# EAGLE board motherboard (EAGLE 9.6.2)
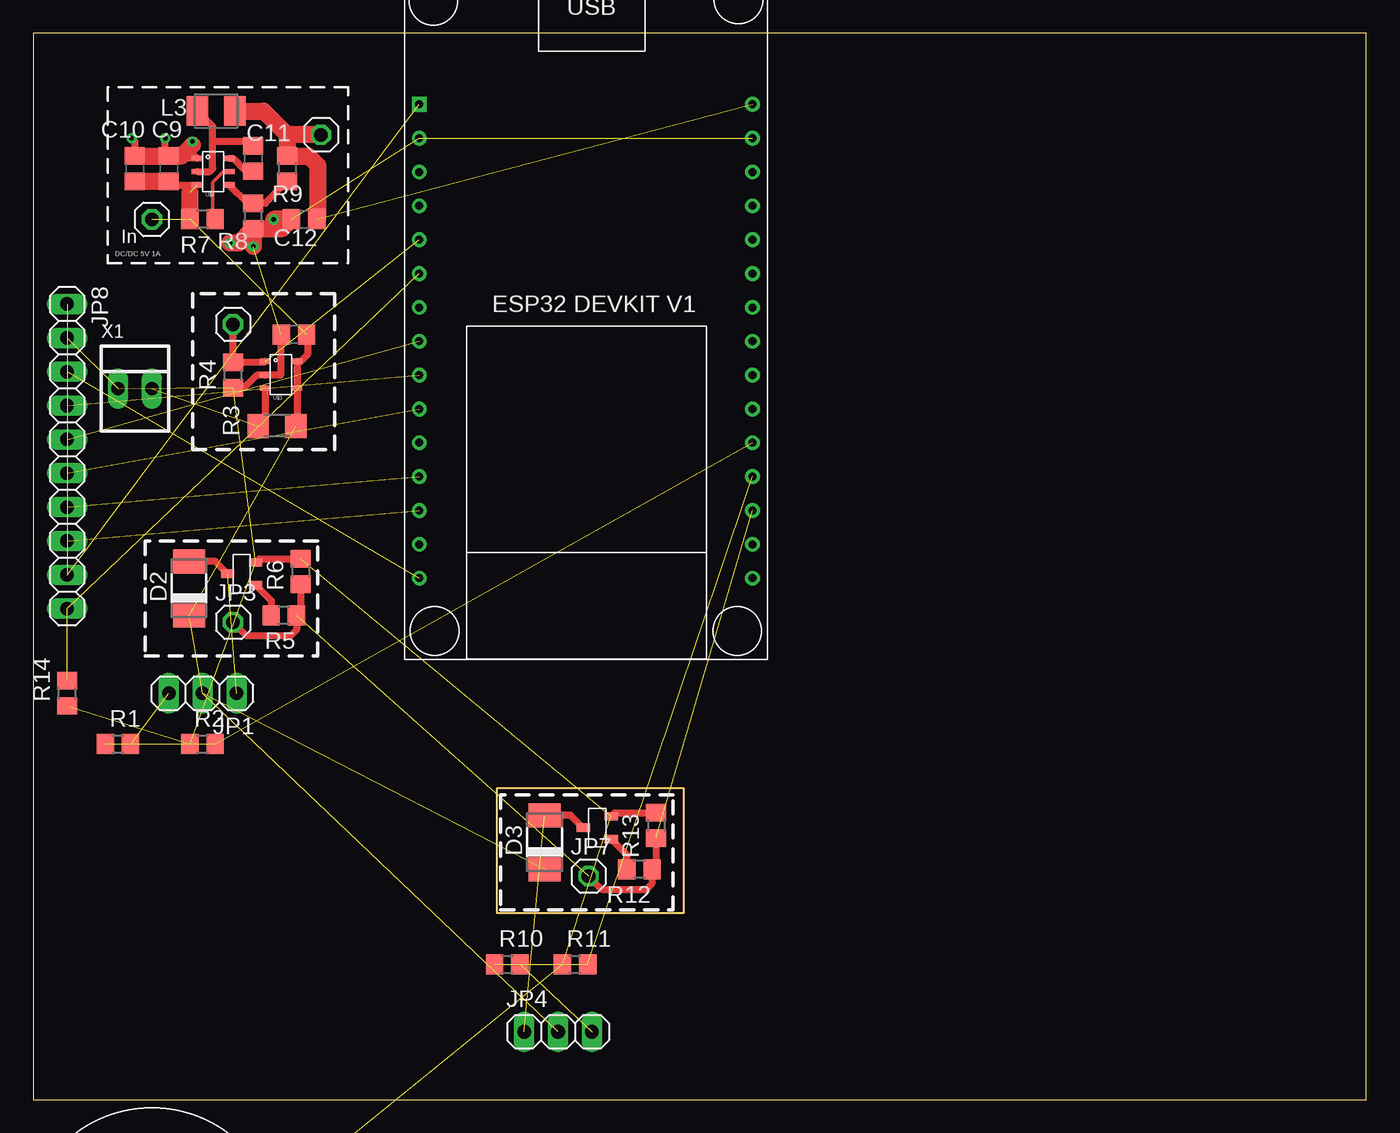
[diagram p0: board, top side]
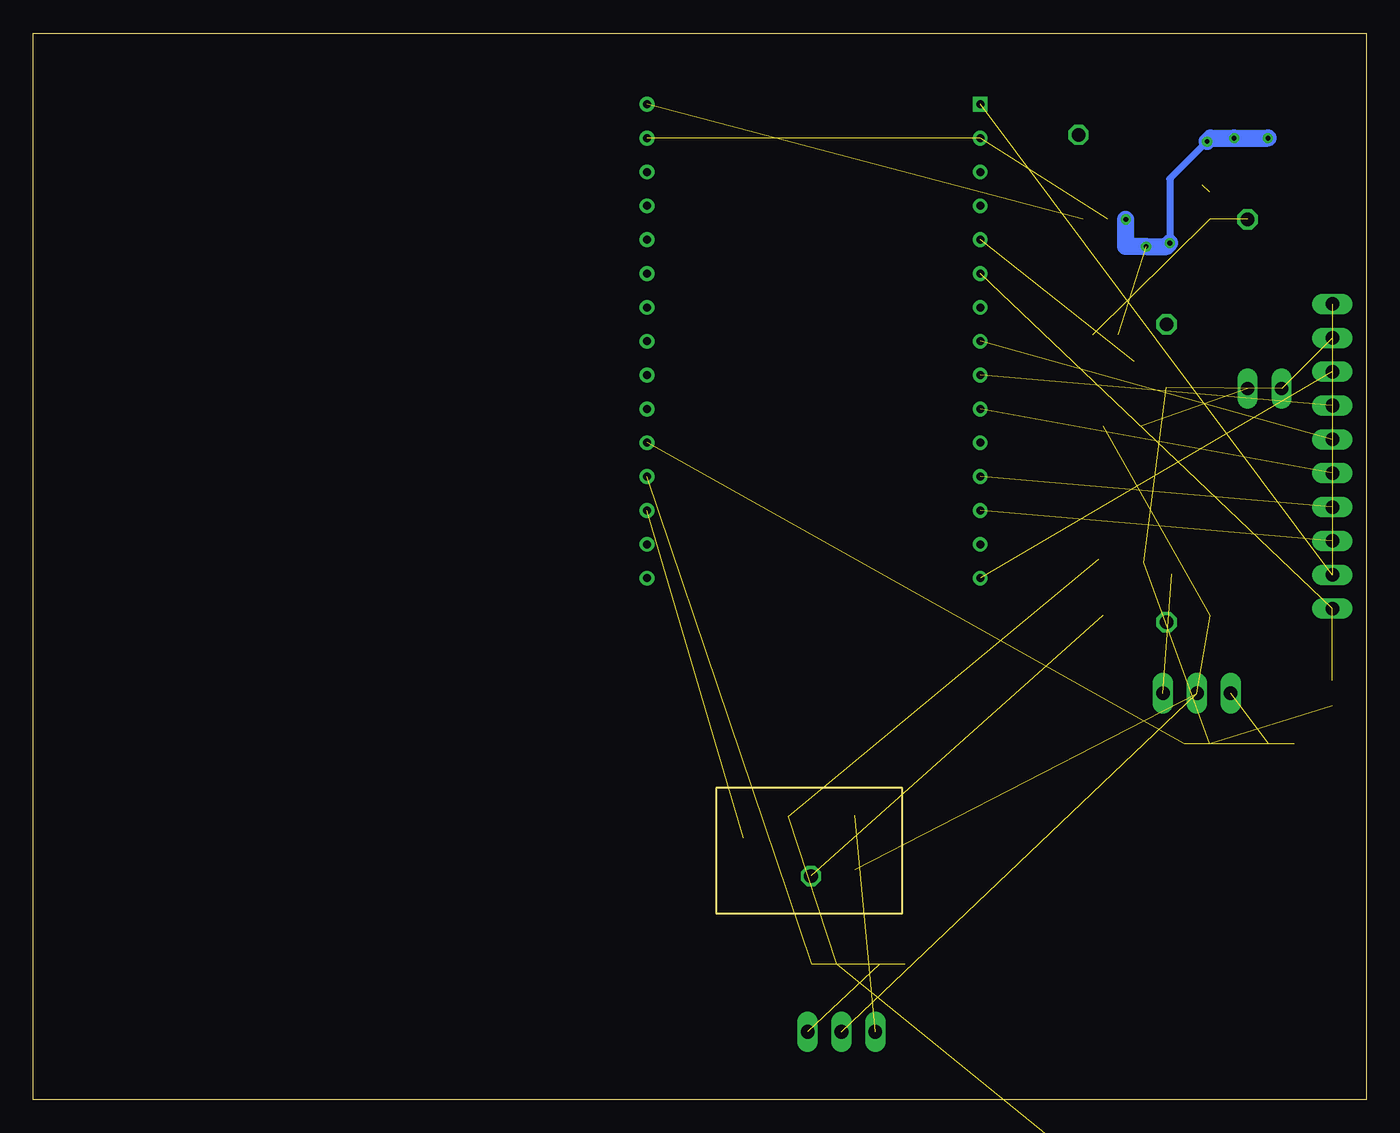
[diagram p1: board, bottom side, seen from below]

Size 100 x 80 mm. Coordinates in mm from the lower left corner, seen from the top.
Outline: 0,0 100,0 100,80 0,80 0,0
Outline: 34.8,13.97 34.8,23.37 48.77,23.37 48.77,13.97 34.8,13.97
Copper layers (1*16): Top 0.035mm / dielectric 1.5mm / Bottom 0.035mm
Design rules "default": minimum track width 6mil, minimum drill 0.35mm, track to track 6mil, track to pad 6mil, pad to pad 6mil, via to via 6mil, smd to smd 6mil, copper to edge 40mil, drill to drill 6mil, minimum pad ring 10mil, minimum via ring 8mil, stop-mask expansion 4mil, vias tented up to drill 0mil, thermal gap 10mil

## Footprints (pad centres in the part's own frame; a part is rotated, then mirrored left to right if it is on the bottom)
C0805 = smd 1.3 x 1.5: 1 -0.95,0; 2 0.95,0
DO-214AC = smd 1.8 x 2.4: A 2.025,0; C -2.025,0
1X03 = drill 1.016 long: 1 -2.54,0; 2 0,0; 3 2.54,0
1X01 = drill 1.016 octagon: 1 0,0
1X10 = drill 1.016 long: 1 -11.43,0; 2 -8.89,0; 3 -6.35,0; 4 -3.81,0; 5 -1.27,0; 6 1.27,0; 7 3.81,0; 8 6.35,0; 9 8.89,0; 10 11.43,0
L3225M = smd 1.6 x 2.2: 1 -1.4,0; 2 1.4,0
R0805 = smd 1.3 x 1.5: 1 -0.95,0; 2 0.95,0
R1206 = smd 1.6 x 1.803: 1 -1.422,0; 2 1.422,0
ESP32_DEVKIT_V1 = drill 0.6 square: PIN_0 -12.954,17.526 | drill 0.6: PIN_1 -12.954,14.986; PIN_2 -12.954,12.446; PIN_3 -12.954,9.906; PIN_4 -12.954,7.366; PIN_5 -12.954,4.826; PIN_6 -12.954,2.286; PIN_7 -12.954,-0.254; PIN_8 -12.954,-2.794; PIN_9 -12.954,-5.334; PIN_10 -12.954,-7.874; PIN_11 -12.954,-10.414; PIN_12 -12.954,-12.954; PIN_13 -12.954,-15.494; PIN_14 -12.954,-18.034; PIN_15 12.046,-18.034; PIN_16 12.046,-15.494; PIN_17 12.046,-12.954; PIN_18 12.046,-10.414; PIN_19 12.046,-7.874; PIN_20 12.046,-5.334; PIN_21 12.046,-2.794; PIN_22 12.046,-0.254; PIN_23 12.046,2.286; PIN_24 12.046,4.826; PIN_25 12.046,7.366; PIN_26 12.046,9.906; PIN_27 12.046,12.446; PIN_28 12.046,14.986; PIN_29 12.046,17.526
MQ_2 = drill 1.2 pad 1.93: A1 -3.4,3.4; A2 -3.4,-3.4; B1 3.3,3.4; B2 3.4,-3.4; H1 0,4.75; H2 0,-4.75
SOT23_5_PIN = smd 0.813 x 0.406: 1 -0.4,-0.5; 2 -0.4,-1.5; 3 -0.4,-2.5; 4 2,-2.5; 5 2,-0.5
SOT23_6_PIN = smd 0.813 x 0.406: 1 -0.4,-0.5; 2 -0.4,-1.5; 3 -0.4,-2.5; 4 2,-2.5; 5 2,-1.5; 6 2,-0.5
SOT23_3_PIN = smd 1 x 0.635: P$1 1.7,-2.3; P$2 1.7,-0.6; P$3 -0.4,-1.45
22-23-2021 = drill 1 long: 1 -1.27,0; 2 1.27,0

## Placement (x,y rotation side)
C1  100n  [C0805]  1.27,-29.21 0 top  (outside the outline)
C2  100n  [C0805]  19.56,57.4 180 top
C9  10u  [C0805]  10.16,69.85 90 top
C10  0.1u  [C0805]  7.62,69.85 90 top
C11  0.1u  [C0805]  16.51,70.61 270 top
C12  50u  [C0805]  20.32,66.04 180 top
D2  1N4148  [DO-214AC]  11.68,38.35 90 top
D3  1N4148  [DO-214AC]  38.35,19.3 90 top
JP1  FAN1  [1X03]  12.7,30.48 180 top
JP2  VSENSE  [1X01]  14.99,58.17 0 top
JP3  FAN1  [1X01]  14.99,35.81 0 top
JP4  FAN2  [1X03]  39.37,5.08 0 top
JP5  4.5V-17V  [1X01]  8.89,66.04 0 top
JP6  7V  [1X01]  21.59,72.39 0 top
JP7  FAN2  [1X01]  41.66,16.76 0 top
JP8  UI  [1X10]  2.54,48.26 270 top
L3  4.7u  [L3225M]  13.72,74.17 0 top
R1  100k  [R0805]  6.35,26.67 0 top
R2  10k  [R0805]  12.7,26.67 0 top
R3  0.1  [R1206]  18.29,50.55 0 top
R4  10k  [R0805]  14.99,54.36 90 top
R5  1k  [R0805]  18.8,36.32 180 top
R6  100k  [R0805]  20.07,39.62 270 top
R7  10k  [R0805]  12.7,66.04 180 top
R8  10k  [R0805]  16.51,66.29 90 top
R9  90k  [R0805]  19.05,69.85 270 top
R10  100k  [R0805]  35.56,10.16 0 top
R11  10k  [R0805]  40.64,10.16 0 top
R12  1k  [R0805]  45.47,17.27 180 top
R13  100k  [R0805]  46.74,20.57 270 top
R14  100k  [R0805]  2.54,30.48 90 top
R15  20k  [R0805]  1.27,-22.86 0 top  (outside the outline)
U$1  ESP32_DEVKIT_V1  [ESP32_DEVKIT_V1]  41.91,57.15 0 top
U$2  MQ_2  [MQ_2]  8.89,-10.16 0 top  (outside the outline)
U$3  INA169  [SOT23_5_PIN]  17.78,55.88 0 top
U$4  TPS561201  [SOT23_6_PIN]  12.7,71.12 0 top
U$5  MGSF1N03L  [SOT23_3_PIN]  14.99,40.89 0 top
U$6  MGSF1N03L  [SOT23_3_PIN]  41.66,21.84 0 top
X1  22-23-2021  [22-23-2021]  7.62,53.34 0 top

## Library data of the parts
C1 C2 C9-C12 = rcl; SPICEPREFIX: C
D2 D3 = diode
JP1-JP8 = pinhead
L3 = rcl; SPICEPREFIX: L
R1-R15 = rcl; SPICEPREFIX: R
U$1-U$6 = bzd
X1 = con-molex; MF: MOLEX; MPN: 22-23-2021; OC_FARNELL: 1462926; OC_NEWARK: 25C3832

## Nets
3.3V: JP8.1 JP8.9 U$1.PIN_0
7V: C12.1 JP6.1 L3.2 R9.1 U$1.PIN_29
12V: R3.1 U$3.3 X1.2
EINK_BUSY: JP8.8 U$1.PIN_12
EINK_DC: JP8.6 U$1.PIN_9
EINK_RST: JP8.7 U$1.PIN_11
FAN1_SENSE: R1.1 R2.2 U$1.PIN_19
FAN2_SENSE: R10.1 R11.2 U$1.PIN_18
FAN_SWITCH: JP3.1 JP7.1 R5.1 R6.2 R12.1 R13.2 U$1.PIN_17
GND: C1.2 C2.2 C9.2 C10.2 C12.2 JP8.2 R2.1 R4.1 R6.1 R8.1 R11.1 R13.1 R14.1 R15.1 U$1.PIN_1 U$1.PIN_28 U$2.H2 U$3.2 U$4.1 U$5.P$2 U$6.P$2 X1.1
GND_FAN1: D2.A JP1.1 U$5.P$3
GND_FAN2: D3.A JP4.1 U$6.P$3
I2C_SCL: U$1.PIN_13
I2C_SDA: U$1.PIN_10
N$1: JP1.3 R1.2
N$2: R5.2 U$5.P$1
N$3: JP4.3 R10.2
N$4: R12.2 U$6.P$1
N$5: U$2.A1 U$2.A2 U$2.H1
N$6: C1.1 R15.2 U$2.B1 U$2.B2
N$9: C11.2 U$4.6
N$10: R7.1 U$4.5
N$11: R8.2 R9.2 U$4.4
N$12: C11.1 L3.1 U$4.2
SPI_CLK: JP8.4 U$1.PIN_8
SPI_CS0: JP8.5 U$1.PIN_7
SPI_MOSI: JP8.3 U$1.PIN_14
SWITCH: JP8.10 R14.2 U$1.PIN_5
VIN_REG: C2.1 C9.1 C10.1 D2.C D3.C JP1.2 JP4.2 JP5.1 R3.2 R7.2 U$3.4 U$3.5 U$4.3
VOUT_CURRENT: JP2.1 R4.2 U$1.PIN_4 U$3.1

## Tracks (layer width: path | path; a pad name or v marks a point on that pad's centre or on a via)
3.3V  (2 unrouted)
7V  (1 unrouted)
  Top 0.508: 21.34,66.11 C12.1
  Top 1.27: L3.2 17.27,74.17 19.05,72.39 | JP6.1 19.05,72.39 | 19.05,72.39 R9.1 20.64,70.8 21.34,70.1 21.34,66.11
12V  (1 unrouted)
  Top 0.508: U$3.3 17.38,51.06 R3.1
EINK_BUSY  (1 unrouted)
EINK_DC  (1 unrouted)
EINK_RST  (1 unrouted)
FAN1_SENSE  (2 unrouted)
FAN2_SENSE  (2 unrouted)
FAN_SWITCH  (2 unrouted)
  Top 0.508: R6.2 20.07,36.64 R5.1 19.75,35.24 19.3,34.8 16,34.8 JP3.1 | R13.2 46.74,17.59 R12.1 46.42,16.19 45.97,15.75 42.67,15.75 JP7.1
GND  (via drill 0.35)  (13 unrouted)
  Top 0.508: v11.94,71.88 11.94,71.63 11.94,70.98 U$4.1 10.34,70.62 C9.2 9.91,71.05 v9.91,72.14 | v7.37,72.14 7.62,71.88 C10.2 | C2.2 18.54,57.34 18.54,54.36 17.4,54.36 U$3.2 17.36,54.36 16.76,54.36 15.81,53.41 R4.1 | U$5.P$2 16.97,40.57 R6.1 | U$6.P$2 43.64,21.52 R13.1
  Top 1.27: C10.2 C9.2 11.11,70.8 11.94,71.63 | v14.73,64.26 15.43,64.26 R8.1 | R8.1 18.67,65.34 C12.2 v18.03,66.04 | R8.1 v16.51,64.01
  Bottom 0.508: v11.94,71.88 14.73,69.09 v14.73,64.26
  Bottom 1.27: v11.94,71.88 11.68,72.14 v9.91,72.14 v7.37,72.14 | v18.03,66.04 18.03,64.01 v16.51,64.01 14.99,64.01 v14.73,64.26
GND_FAN1  (1 unrouted)
  Top 0.508: U$5.P$3 13.65,40.38 D2.A
GND_FAN2  (1 unrouted)
  Top 0.508: U$6.P$3 40.32,21.33 D3.A
N$1  (1 unrouted)
N$2
  Top 0.508: U$5.P$1 17.85,37.43 R5.2
N$3  (1 unrouted)
N$4
  Top 0.508: U$6.P$1 44.52,18.38 R12.2
N$5  (2 unrouted)
N$6  (3 unrouted)
N$9
  Top 0.508: U$4.6 14.98,70.62 15.94,69.66 C11.2
N$10
  Top 0.254: U$4.5 14.68,69.6 14.22,69.6 13.46,68.83 13.46,66.23 R7.1
N$11
  Top 0.508: U$4.4 16.08,67.24 R8.2 17.39,67.24 R9.2
N$12
  Top 0.508: U$4.2 13.23,69.62 13.46,69.85 13.46,71.88 | 13.46,71.88 13.46,73.02 L3.1 | C11.1 16.19,71.88 13.46,71.88
SPI_CLK  (1 unrouted)
SPI_CS0  (1 unrouted)
SPI_MOSI  (1 unrouted)
SWITCH  (2 unrouted)
VIN_REG  (7 unrouted)
  Top 0.508: C2.1 20.57,57.34 20.57,55.88 20.07,55.38 U$3.5 U$3.4 19.78,50.62 R3.2 | C9.1 10.44,68.62 U$4.3
  Top 1.27: C10.1 C9.1 | R7.2 11.75,68.07
VOUT_CURRENT  (1 unrouted)
  Top 0.508: JP2.1 R4.2 17.31,55.31 U$3.1

## Text on the board
tPlace: In | DC/DC 5V 1A